# Altium PCB AIO-RF-v2.PcbDoc
Units mil, origin at the board's own origin, x right, y up, seen from the top; angles counter-clockwise.
Board outline 2160 x 3300 mil, 4 copper layers (Top Layer, Inner Layer 1, Inner Layer 2, Bottom Layer), stack 62.13 mil thick; 50 components, 44 nets, 218 pads, 251 vias.
Unrouted connection lines stored in the file: 4.
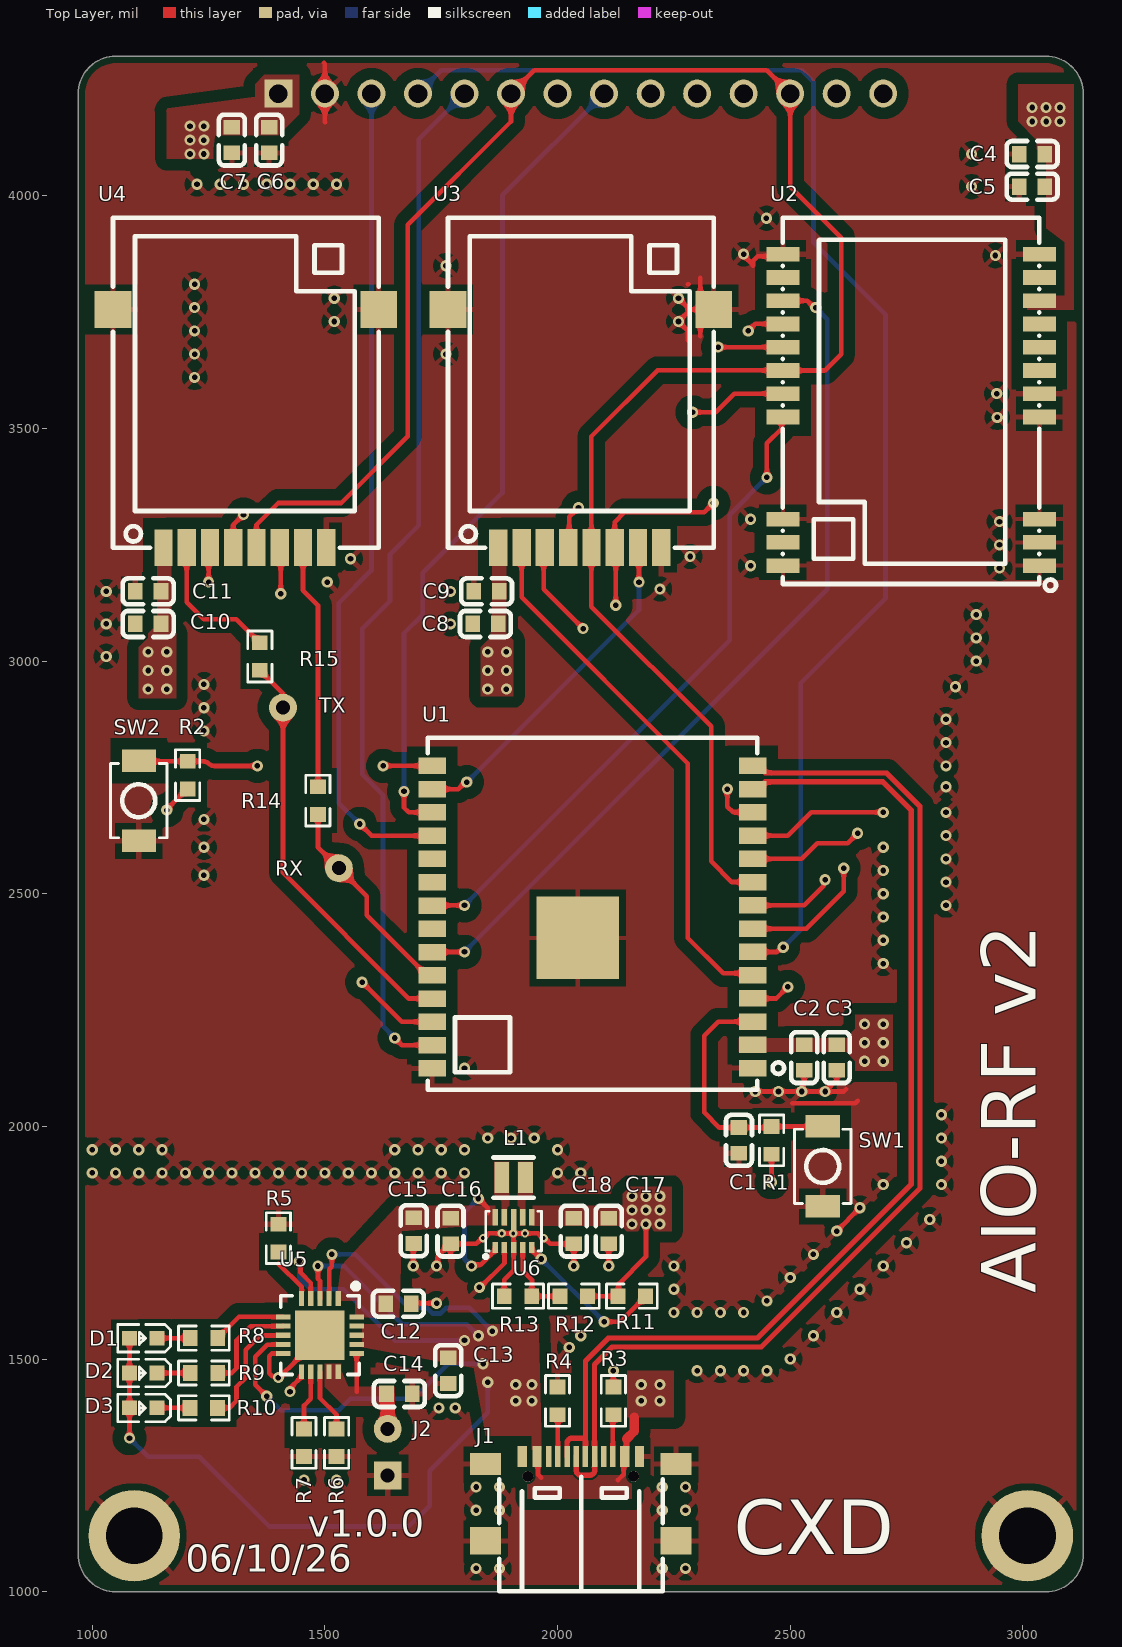
[diagram p0: Top Layer view]
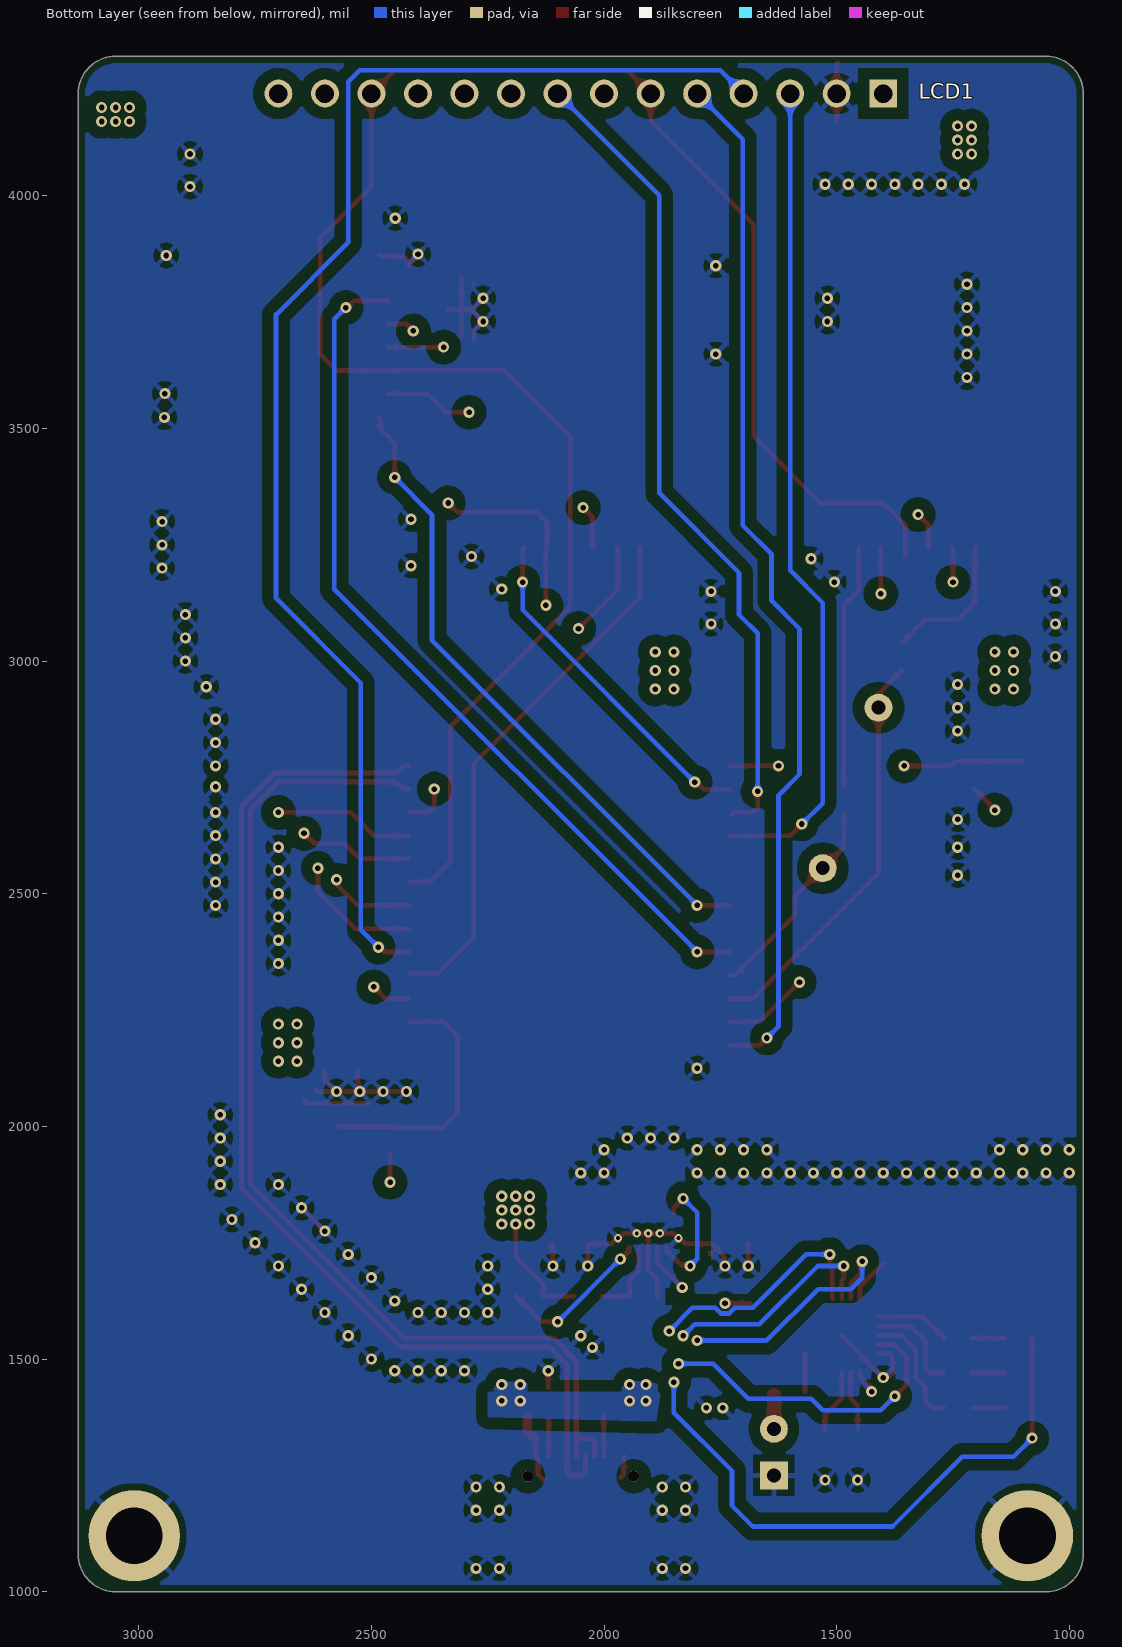
[diagram p1: Bottom Layer view, seen from below]
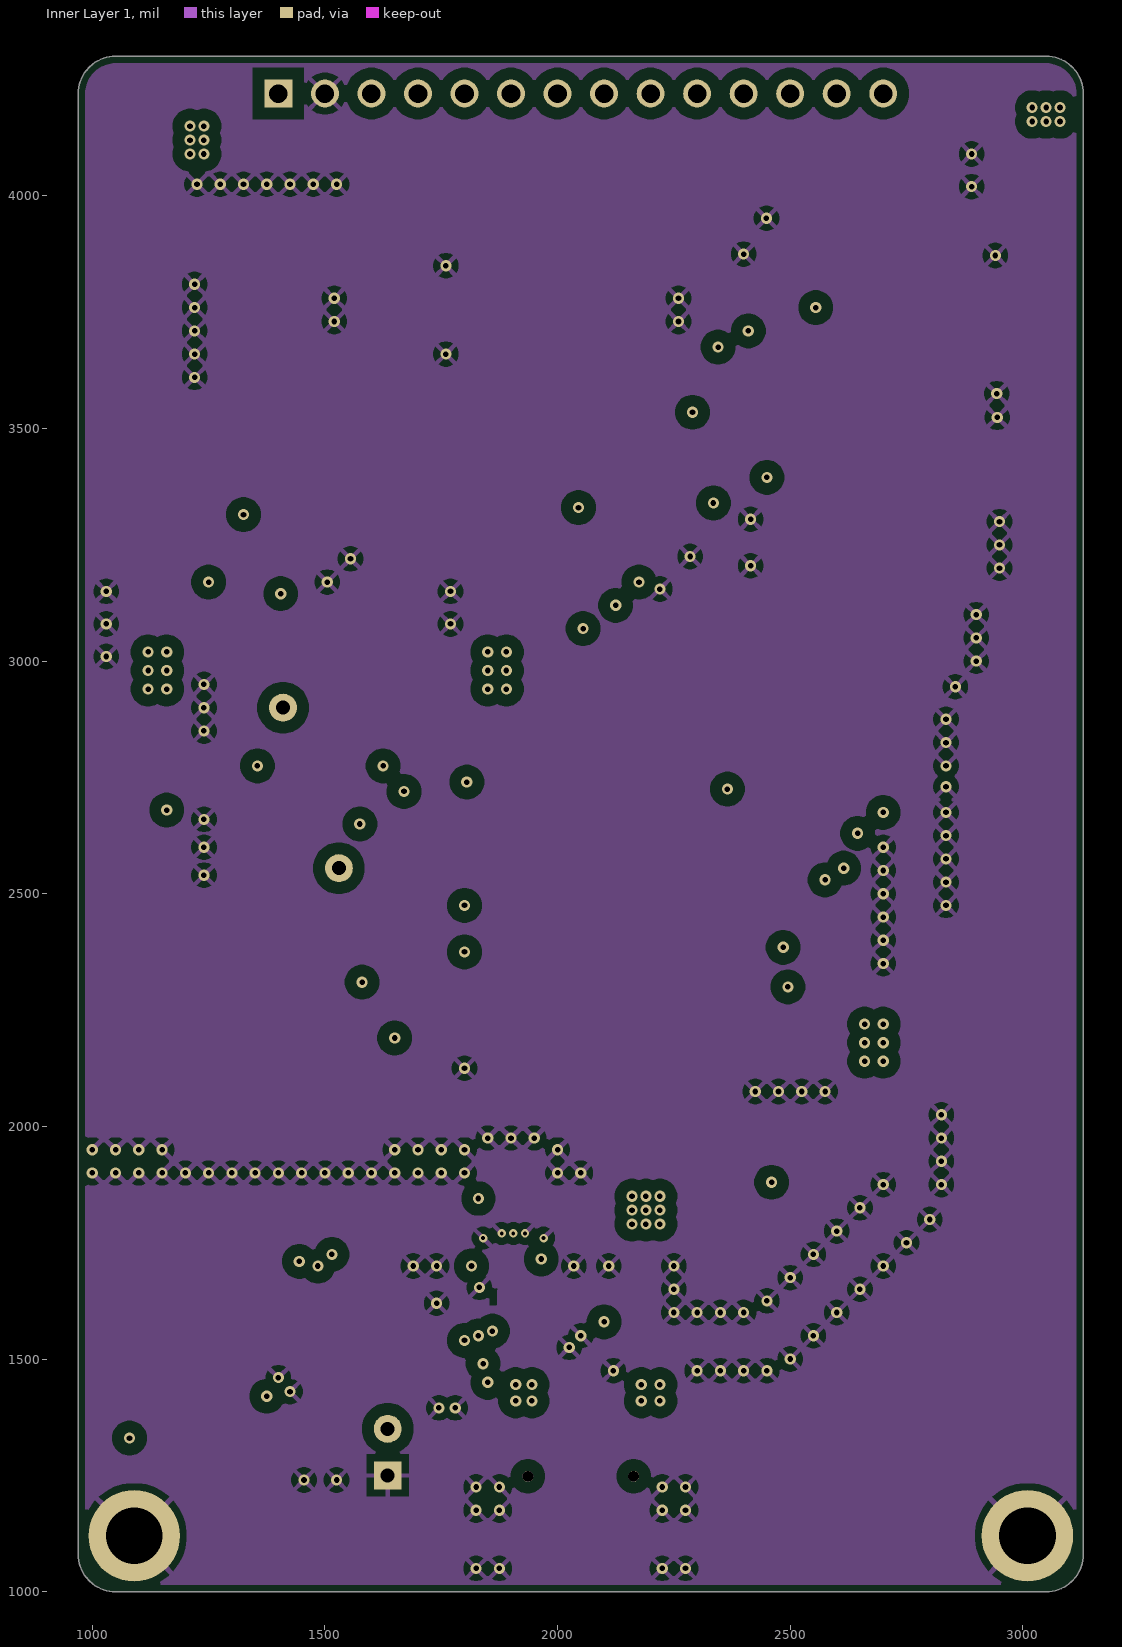
[diagram p2: Inner Layer 1]
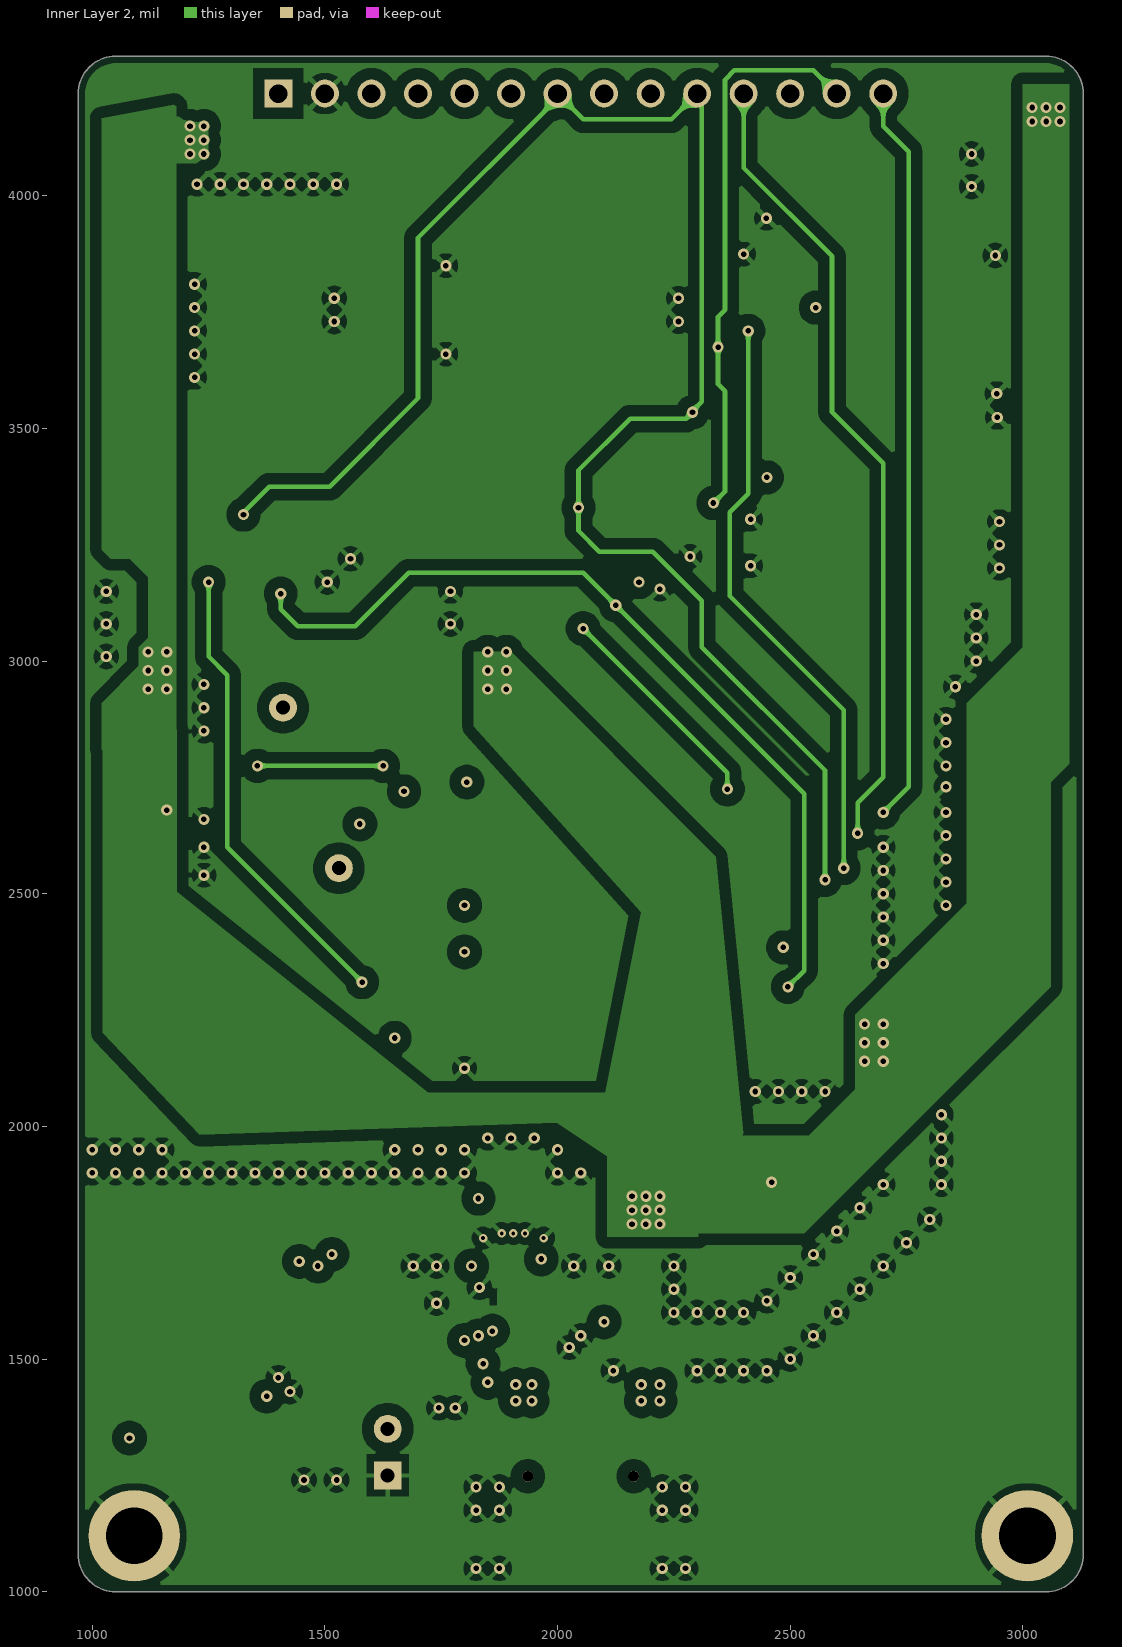
[diagram p3: Inner Layer 2]
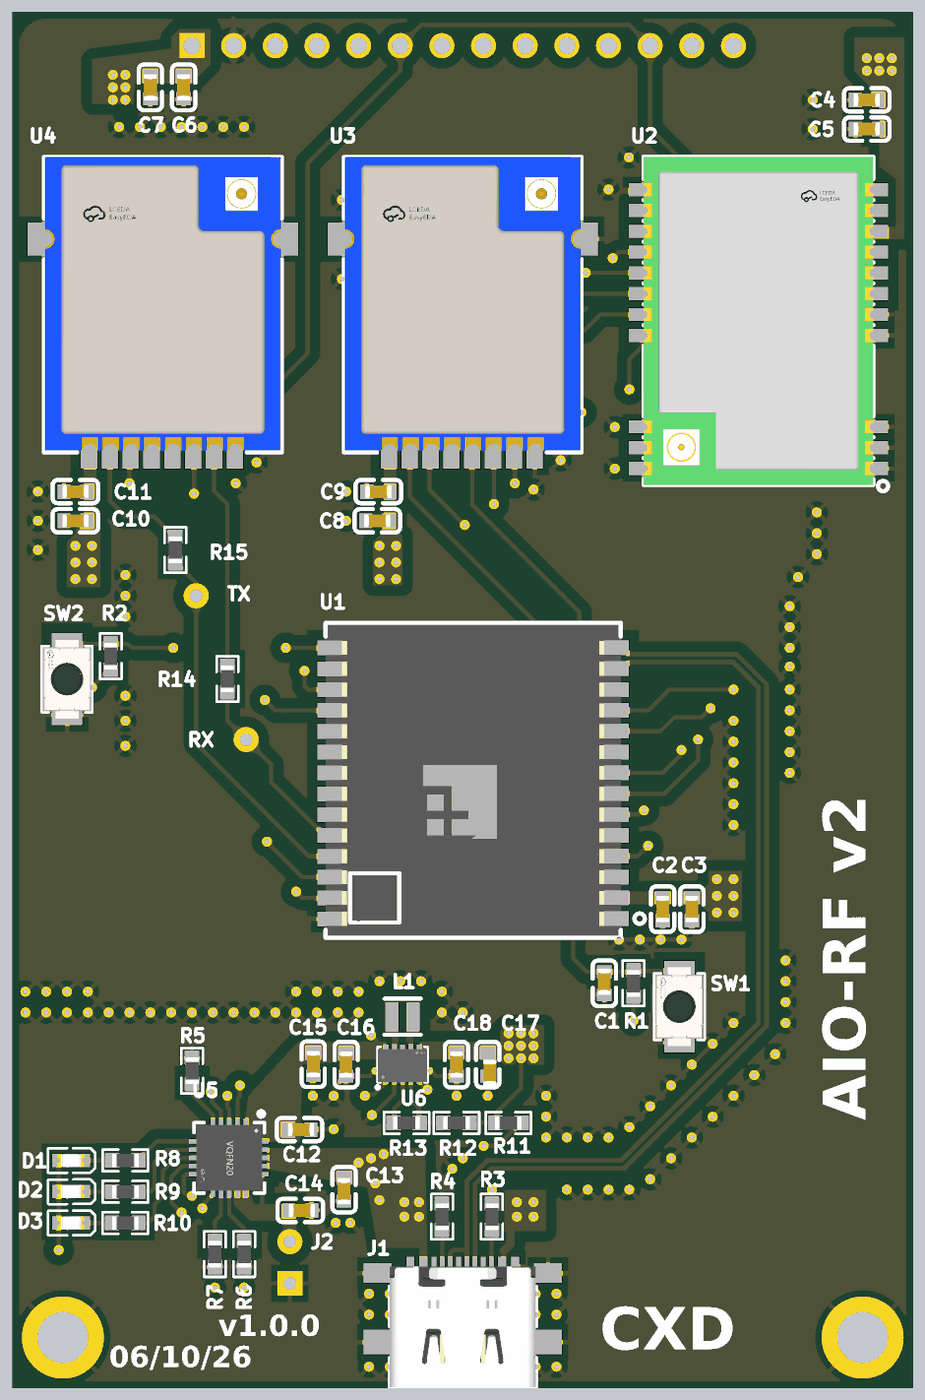
[diagram p4: 3D render of the assembled board from above, using the file's embedded part models]

## Layer stack, top to bottom
Top Solder: solder mask 0.4, Solder Resist, Dk 3.5
Top Layer: signal copper 1.38
Dielectric 4: prepreg 4.21, PP-006, Dk 4.1
Dielectric 2: prepreg 3.91, PP-006, Dk 4.1
Inner Layer 1: signal copper 0.6
Dielectric 1: dielectric 41.93, FR-4, Dk 4.8
Inner Layer 2: signal copper 0.6
Dielectric 3: prepreg 3.91, PP-006, Dk 4.1
Dielectric 5: prepreg 4.21, PP-006, Dk 4.1
Bottom Layer: signal copper 1.38
Bottom Solder: solder mask 0.4, Solder Resist, Dk 3.5

## Board outline
970,1080 970,4220 cw(c1050,4220) 1050,4300 3050,4300 cw(c3050,4220) 3130,4220 3130,1080 cw(c3050,1080) 3050,1000 1050,1000 cw(c1050,1080)

## Design rules (kind name [scope] priority, off if disabled: settings)
BoardOutlineClearance [All] p1: gap=15 ignorepadtopadclearanceinfootprint=FALSE
Clearance Clearance_2 [InNamedPolygon('GND_POUR_MAIN')] p1: gap=25 ignorepadtopadclearanceinfootprint=TRUE
Clearance Clearance_1 [IsPad And InComponent('J1') vs IsPad And InComponent('J1')] p2: gap=5 ignorepadtopadclearanceinfootprint=TRUE
Clearance [All] p3: gap=5 ignorepadtopadclearanceinfootprint=TRUE
DiffPairsRouting [All] p1: maxlimit=8 minlimit=5 mostfreqgap=8 toplayer_mingap=8 toplayer_minwidth=11.26 toplayer_maxwidth=11.26 toplayer_prefwidth=11.26 midlayer1_maxgap=5 midlayer1_prefgap=5 midlayer1_minwidth=5.28 midlayer1_maxwidth=5.28 midlayer1_prefwidth=5.28 midlayer2_maxgap=5 midlayer2_prefgap=5 midlayer2_minwidth=5.28 midlayer2_maxwidth=5.28 midlayer2_prefwidth=5.28 bottomlayer_mingap=8 bottomlayer_minwidth=11.26 bottomlayer_maxwidth=11.26 bottomlayer_prefwidth=11.26 impedanceprofiledriven=TRUE impedanceprofileid={49900CF8-A248-4DBF-941E-E8373B0624FA} impedanceprofilevalue=90.000000 maxuncoupledlength=500
PlaneConnect PlaneConnect_1 [InNet('GND')] p1: planeconnectstyle=Relief reliefexpansion=25 reliefentries=4 reliefconductorwidth=10 reliefairgap=15
PlaneConnect [All] p2: planeconnectstyle=Direct reliefexpansion=20 reliefentries=4 reliefconductorwidth=10 reliefairgap=10
PolygonConnect PolygonConnect_1 [InNet('GND') vs InNet('GND')] p1: connectstyle=Relief reliefconductorwidth=10 reliefentries=4 polygonreliefangle="90 Angle" conductorbypadedge=TRUE mindistance=15 enablemindistance=FALSE airgapwidth=15
PolygonConnect [All] p2: connectstyle=Direct reliefconductorwidth=10 reliefentries=4 polygonreliefangle="90 Angle" airgapwidth=10
RoutingVias [All] p1: holewidth=12 width=24 viastyle="Through Hole" minholewidth=12 minwidth=24 maxholewidth=28 maxwidth=50
SolderMaskExpansion [All] p1: expansion=0 istentingtop=FALSE
SupplyNets "Schematic Supply Nets_2" [InNet('+5')] p1: voltage=0.000
SupplyNets "Schematic Supply Nets_1" [InNet('GND')] p2: voltage=0.000
SupplyNets "Schematic Supply Nets" [InNet('+3.3')] p3: voltage=0.000
Width Width_1 [All] p1: maxlimit=10 minlimit=6 preferedwidth=6
Width [All] p2: maxlimit=10 minlimit=6 preferedwidth=8
28 further rules are at their usual default settings.

## Classes and differential pairs
component class Sheet2: C12 C13 C14 C15 C16 C17 C18 D1 D2 D3 J2 L1 R5 R6 R7 R8 R9 R10 R11 R12 R13 U5 U6
component class Sheet1: C1 C2 C3 C4 C5 C6 C7 C8 C9 C10 C11 J1 LCD1 R1 R2 R3 R4 R14 R15 RX SW1 SW2 TX U1 U2 U3 U4
differential pair USB: +USB_P -USB_N

## Components (designator, comment, footprint, x,y, rotation, side; value= is the part's Value field where it differs from the comment)
C1 "C19666 4.7uF" C19666 2390,1970 r270 top
C2 "C1591 100nF" C1591 2530,2148 r90 top
C3 "C19702 10uF" C19702 2600,2148 r90 top
C4 "C1591 100nF" C1591 3020,4090 r0 top
C5 "C19702 10uF" C19702 3020,4020 r0 top
C6 "C19702 10uF" C19702 1380,4120 r90 top
C7 "C1591 100nF" C1591 1300,4120 r90 top
C8 "C19702 10uF" C19702 1845,3080 r180 top
C9 "C1591 100nF" C1591 1847.44,3150 r180 top
C10 "C19702 10uF" C19702 1120,3080 r180 top
C11 "C1591 100nF" C1591 1120,3150 r180 top
C12 "C19666 4.7uF" C19666 1658,1619 r180 top
C13 "C19666 4.7uF" C19666 1765,1475 r90 top
C14 "C19666 4.7uF" C19666 1660,1425 r180 top
C15 "C19702 10uF" C19702 1691,1776 r90 top
C16 "C1591 100nF" C1591 1770,1775 r90 top
C17 "C86295 22uF" C86295 2110,1775 r90 top
C18 "C1591 100nF" C1591 2035,1775 r90 top
D1 "C219226" C219226 1109.49,1545.01 r180 top
D2 "C219226" C219226 1109.49,1470.01 r180 top
D3 "C219226" C219226 1109.49,1395.01 r180 top
J1 "C5187472 TYPE-C 16P QTWT" C5187472 2050,1200 r0 top
J2 "2P-2.54" 2P-2.54 1635,1250 r0 top
L1 "hctc-201610-1r0-m" Inductor 1872.28,1856.69 r0 top
LCD1 "LCD" LCD 1400,4220 r90 bottom
R1 "C98220 10kΩ" C98220 2460,1970 r90 top
R2 "C98220 10kΩ" C98220 1205,2755 r90 top
R3 "C105580 5.1KΩ" C105580 2120,1410 r270 top
R4 "C105580 5.1KΩ" C105580 2000,1410 r270 top
R5 "C98220 10KΩ" C98220 1400,1760 r270 top
R6 "C22975 2KΩ" C22975 1525,1320 r270 top
R7 "C98220 10KΩ" C98220 1455,1320 r90 top
R8 "C105580 5.1KΩ" C105580 1240,1545 r180 top
R9 "C105580 5.1KΩ" C105580 1240,1470 r180 top
R10 "C105580 5.1KΩ" C105580 1239.66,1395 r180 top
R11 "100K" C22975 2159.66,1635 r180 top
R12 "511K" C22975 2035,1635 r0 top
R13 "91K" C22975 1915,1635 r0 top
R14 "DNP" C98220 1485,2700.34 r90 top
R15 "DNP" C98220 1360,3010 r90 top
RX "TP" TP 1530,2555 r0 top
SW1 "C720477" C720477 2570,1913.98 r90 top
SW2 "C720477" C720477 1100,2700 r90 top
TX "TP" TP 1410,2900 r0 top
U1 "C52139915 ESPC5-32E-H4" C52139915 2075,2450 r180 top locked
U2 "C2965513 E07-400M10S" C2965513 2760,3540 r0 top
U3 "C97340 E01-ML01SP4" C97340 2050,3500 r0 top
U4 "C97340 E01-ML01SP4" C97340 1330,3500 r0 top
U5 "C5121473" C5121473 1489.37,1551.26 r180 top
U6 "C1849531" C1849531 1905.63,1772.48 r0 top

## Footprints (in the part's own frame and the unit in brackets; to place one, negate y for a bottom-side part, rotate by r counter-clockwise, add the part's x,y. Pads: shape width x height; smd on the part's side, far side on the other; paste and mask are expansions set on the pad)
2P-2.54 [mil]
  rect 60x60 hole 30: 1(0,0)
  round 60 hole 30: 2(0,100)
C1591 [mm]
  rect 0.8x0.9 smd paste+0 mask+0.051: 1(-0.7,0) 2(0.7,0)
  silkscreen extent -1.39,-0.71 1.39,0.71, body extent -0.8,-0.4 0.8,0.4, height 0.4
C19666 [mm]
  rect 0.8x0.9 smd paste+0 mask+0.051: 1(-0.7,0) 2(0.7,0)
  silkscreen extent -1.39,-0.71 1.39,0.71, body extent -0.9,-0.4 0.7,0.4, height 0.4
C19702 [mm]
  rect 0.8x0.9 smd paste+0 mask+0.051: 1(-0.7,0) 2(0.7,0)
  silkscreen extent -1.39,-0.71 1.39,0.71, body extent -0.8,-0.4 0.8,0.4, height 0.4
C22975 [mil]
  rect 31.75x34.02 smd paste-3937.01 mask+2: 1(-29.66,0) 2(29.66,0)
  silkscreen extent -55,-26 55,26, body extent -32,-16 32,16, height 17
C86295 [mm]
  rect 0.8x0.9 smd paste+0 mask+0.051: 1(-0.7,0) 2(0.7,0)
  silkscreen extent -1.39,-0.71 1.39,0.71, body extent -1.3,-0.53 0.3,0.27, height 0.4
C97340 [mm]
  rect 1x2 smd paste+0 mask+0.051: 1(-4.499,-6.501) 2(-3.23,-6.498) 3(-1.96,-6.498) 4(-0.69,-6.498) 5(0.58,-6.498) 6(1.85,-6.498) 7(3.12,-6.498) 8(4.39,-6.498)
  rect 2x2 smd paste+0 mask+0.051: 9(7.25,6.501) 10(-7.25,6.501)
  silkscreen extent -7.25,-6.5 7.25,11.5, body extent -7.2,-6.39 7.2,11.51, height 2.1
C98220 [mil]
  rect 31.75x34.02 smd paste-3937.01 mask+2: 1(-29.66,0) 2(29.66,0)
  silkscreen extent -55,-26 55,26, body extent -32,-16 32,16, height 17
C105580 [mil]
  rect 31.75x34.02 smd paste-3937.01 mask+2: 1(-29.66,0) 2(29.66,0)
  silkscreen extent -55,-26 55,26, body extent -32,-16 32,16, height 17
C219226 [mm]
  rect 0.8x0.8 smd paste+0 mask+0.051: 1(-0.749,0) 2(0.749,0)
  silkscreen extent -1.49,-0.75 1.39,0.76, body extent -0.81,-0.41 0.81,0.41, height 0.55
C720477 [mm]
  rect 1.23x1.86 smd paste+0 mask+0.051: 1(-2.185,0) 2(2.185,0)
  silkscreen extent -2.03,-1.54 2.03,1.54, body extent -2.4,-1.45 2.4,1.45, height 1.95
C1849531 [mm]
  rect 0.3x0.6 smd paste+0 mask+0.051: 1(-1,-0.825) 2(-0.5,-0.825) 3(0,-0.825) 4(0.5,-0.825) 5(1,-0.825)
  rect 0.3x0.9 smd paste+0 mask+0.051: 6(1,0.825) 7(0.5,0.825) 9(-0.5,0.825) 10(-1,0.825)
  rect 0.3x1.3 smd paste+0 mask+0.051: 8(0,0.625)
  silkscreen extent -1.62,-1.42 1.52,1.14, body extent -1.5,-1 1.5,1, height 0.58
C2965513 [mm]
  rect 1.8x0.8 smd paste+0 mask+0.05: 1(7,-8.5) 2(7,-7.23) 3(7,-5.96) 4(7,-0.39) 5(7,0.88) 6(7,2.15) 7(7,3.42) 8(7,4.69) 9(7,5.96) 10(7,7.23) 11(7,8.5) 12(-7,8.5) 13(-7,7.23) 14(-7,5.96) 15(-7,4.69) 16(-7,3.42) 17(-7,2.15) 18(-7,0.88) 19(-7,-0.39) 20(-7,-5.96) 21(-7,-7.23) 22(-7,-8.5)
  silkscreen extent -7,-9.88 7.91,10.5, body extent -7,-9.5 7,10.5, height 2.41
C5121473 [mm]
  rect 0.28x0.8 smd paste-100 mask+0.051: 1(-1,-2) 2(-0.5,-2) 3(0,-2) 4(0.5,-2) 5(1,-2) 11(1,2) 12(0.5,2) 13(0,2) 14(-0.5,2) 15(-1,2)
  rect 0.8x0.28 smd paste-100 mask+0.051: 6(2,-1) 7(2,-0.5) 8(2,0) 9(2,0.5) 10(2,1) 16(-2,1) 17(-2,0.5) 18(-2,0) 19(-2,-0.5) 20(-2,-1)
  rect 2.7x2.7 smd paste-100 mask+0.051: 21(0,0)
  silkscreen extent -2.15,-2.82 2.15,2.15, body extent -2.01,-2.01 2.01,2.01, height 1
C5187472 [mm]
  rect 1.7x1.5 smd paste+0 mask+0.051: 0(-5.2,-2.309) 0(5.2,-2.309)
  rect 1.7x1.2 smd paste+0 mask+0.051: 0(-5.2,1.891) 0(5.2,1.891)
  rect 0.5x1.14 smd paste+0 mask+0.051: A1B12(-3.2,2.308) A4B9(-2.4,2.308) B1A12(3.2,2.308) B4A9(2.4,2.308)
  rect 0.3x1.14 smd paste+0 mask+0.051: A5(-1.25,2.308) A6(-0.25,2.308) A7(0.25,2.308) A8(1.25,2.309) B5(1.75,2.308) B6(0.75,2.308) B7(-0.75,2.308) B8(-1.75,2.309)
  round 0.6 hole 0.6 unplated: ""(-2.89,1.221) ""(2.89,1.221)
  silkscreen extent -4.46,-5.05 4.48,1.2, body extent -5.67,-5.05 5.67,2.55, height 1.61
C52139915 [mm]
  rect 1.5x0.9 smd paste+0 mask+0.051: 1(-8.75,8.25) 2(-8.75,6.98) 3(-8.75,5.71) 4(-8.75,4.44) 5(-8.75,3.17) 6(-8.75,1.9) 7(-8.75,0.63) 8(-8.75,-0.64) 9(-8.75,-1.91) 10(-8.75,-3.18) 11(-8.75,-4.45) 12(-8.75,-5.72) 13(-8.75,-6.99) 14(-8.75,-8.26) 15(8.75,-8.25) 16(8.75,-6.98) 17(8.75,-5.71) 18(8.75,-4.44) 19(8.75,-3.17) 20(8.75,-1.9) 21(8.75,-0.63) 22(8.75,0.64) 23(8.75,1.91) 24(8.75,3.18) 25(8.75,4.45) 26(8.75,5.72) 27(8.75,6.99) 28(8.75,8.26)
  rect 4.5x4.5 smd paste+0 mask+0.051: 29(0.8,1.14)
  silkscreen extent -10.47,-9.78 9,9.42, body extent -9,-9.75 9,9.45, height 3
Inductor [mm]
  rect 0.8x1.7 smd paste+0 mask+0.051: 1(0.196,0.846) 2(1.496,0.846)
  silkscreen extent -0.25,-0.25 1.95,1.95
LCD [mil]
  rect 60x60 hole 40: 1(0,0)
  round 60 hole 40: 2(0,100) 3(0,200) 4(0,300) 5(0,400) 6(0,500) 7(0,600) 8(0,700) 9(0,800) 10(0,900) 11(0,1000) 12(0,1100) 13(0,1200) 14(0,1300)
TP [mil]
  round 60 hole 30: 1(0,0)

## Part data
C1 C12 C13 C14: library part C19666, "4.7uF (475) ±10% 16V", Manufacturer=SAMSUNG(三星), Manufacturer Part Number=CL10A475KO8NNNC, Package=C0603, Imported By="JLCAltiumImporter 0.3.1", LCSC Part Number=C19666, Supplier=LCSC, Supplier Part Number=C19666
C2 C4 C7 C9 C11 C16 C18: library part C1591, "100nF (104) ±10% 50V", Manufacturer=SAMSUNG(三星), Manufacturer Part Number=CL10B104KB8NNNC, Package=C0603, Imported By="JLCAltiumImporter 0.3.1", LCSC Part Number=C1591, Supplier=LCSC, Supplier Part Number=C1591
C3 C5 C6 C8 C10 C15: library part C19702, Manufacturer=SAMSUNG(三星), Manufacturer Part Number=CL10A106KP8NNNC, Package=C0603, Imported By="JLCAltiumImporter 0.3.1", LCSC Part Number=C19702, Supplier=LCSC, Supplier Part Number=C19702
C17: library part C86295, Manufacturer=SAMSUNG(三星), Manufacturer Part Number=CL10A226MP8NUNE, Package=C0603, Imported By="JLCAltiumImporter 0.3.1", LCSC Part Number=C86295, Supplier=LCSC, Supplier Part Number=C86295
D1 D2 D3: Manufacturer=HONGLITRONIC(鸿利光电), Manufacturer Part Number=HL-PST-1608H233W(9000-16000K), Package=LED0603-RD, Imported By="JLCAltiumImporter 0.3.2", LCSC Part Number=C219226, Supplier=LCSC, Supplier Part Number=C219226
J1: library part C5187472, Manufacturer="SHOU HAN(首韩)", Manufacturer Part Number="TYPE-C 16P QTWT", Package=USB-TYPE-C-SMD_TYPE-C-16P-QTWT, Imported By="JLCAltiumImporter 0.2.3", LCSC Part Number=C5187472, Supplier=LCSC, Supplier Part Number=C5187472
L1: JLCPCB Part Class="Extended Part", LCSC Part Name="1uH ±20% 4.6A", Manufacturer=YOUCHI(佑驰), ManufacturerPart=HCTC-201610-1R0-M, AddInBom=yes, ConvertToPcb=yes, Datasheet=https://item.szlcsc.com/datasheet/HCTC-201610-1R0-M/51586942.html, FootprintName=IND-SMD_L2.0-W1.6_MTQH201610S, ModelId=354c7c64a6c14853a17e163bf9c9633c, ModelName=IND-SMD_L2.0-W1.6_MTQH201610S, ModelTransform=78.74,63.3857,0,0,0,0,0,0,0, Supplier=LCSC, Supplier Footprint=0806, SupplierPart=C49190099, Symbol=HCTC-201610-1R0-M
R1 R2 R5 R7 R14 R15: library part C98220, Manufacturer=YAGEO(国巨), Manufacturer Part Number=RC0603FR-0710KL, Package=R0603, Imported By="JLCAltiumImporter 0.3.1", LCSC Part Number=C98220, Supplier=LCSC, Supplier Part Number=C98220
R3 R4 R8 R9 R10: library part C105580, Manufacturer=YAGEO(国巨), Manufacturer Part Number=RC0603FR-075K1L, Package=R0603, Imported By="JLCAltiumImporter 0.3.1", LCSC Part Number=C105580, Supplier=LCSC, Supplier Part Number=C105580
R6 R11 R12 R13: library part C22975, "2KΩ (2001) ±1%", Manufacturer=UNI-ROYAL(厚声), Manufacturer Part Number=0603WAF2001T5E, Package=R0603, Imported By="JLCAltiumImporter 0.3.1", LCSC Part Number=C22975, Supplier=LCSC, Supplier Part Number=C22975
SW1 SW2: Manufacturer=XUNPU(讯普), Manufacturer Part Number=TS-1088-AR02016, Package=SW-SMD_L3.9-W3.0-P4.45, Imported By="JLCAltiumImporter 0.2.3", LCSC Part Number=C720477, Supplier=LCSC, Supplier Part Number=C720477
U1: library part C52139915, Manufacturer=DOIT(四博智联), Manufacturer Part Number=ESPC5-32E-H4, Package=WIFIM-SMD_28P-L19.2-W18.0-P1.27-TL_ESPC5-32E-H4, Imported By="JLCAltiumImporter 0.2.3", LCSC Part Number=C52139915, Supplier=LCSC, Supplier Part Number=C52139915
U2: library part C2965513, Manufacturer=EBYTE(亿佰特), Manufacturer Part Number=E07-400M10S, Package=COMM-SMD_E07-400M10S, Imported By="JLCAltiumImporter 0.2.3", LCSC Part Number=C2965513, Supplier=LCSC, Supplier Part Number=C2965513
U3 U4: library part C97340, Manufacturer=EBYTE(亿佰特), Manufacturer Part Number=E01-ML01SP4, Package=WIRELM-TH_E01-ML01SP4, Imported By="JLCAltiumImporter 0.2.3", LCSC Part Number=C97340, Supplier=LCSC, Supplier Part Number=C97340
U5: Manufacturer=MICROCHIP(美国微芯), Manufacturer Part Number=MCP73871-2CCI/ML, Package=QFN-20_L4.0-W4.0-P0.50-BL-EP2.7, Imported By="JLCAltiumImporter 0.3.1", LCSC Part Number=C5121473, Supplier=LCSC, Supplier Part Number=C5121473
U6: Manufacturer=TI(德州仪器), Manufacturer Part Number=TPS63802DLAT, Package=VSON-10-HR_L3.0-W2.0-P0.50-BL_TI_DLA, Imported By="JLCAltiumImporter 0.3.5", LCSC Part Number=C1849531, Supplier=LCSC, Supplier Part Number=C1849531

## Free pads (board coordinates)
  round 196.85 hole 122.05 paste-99999 mask-99999: 18(1090,1120) 18(3010,1120)

## Via types
v1: diameter 24, hole 12, Top Layer to Bottom Layer, 246 vias
v2: diameter 18, hole 8, Top Layer to Bottom Layer, 5 vias

## Nets (pads, with @x,y where several pads share a name; then routed paths per layer and width w, separated by ;. In a path a pad name is that pad's centre, name@x,y a point inside that pad or via, vN(x,y) a via of type N, cw(c..) or ccw(c..) an arc to the next point about the centre after c; other vN are vias at no path point)
+3.3: C2.2 C3.2 C4.2 C5.2 C6.2 C7.2 C8.1 C9.1 C10.1 C11.1 C17.2 C18.2 LCD1.1 R1.1 R2.1 R11.2 R12.2 U1.2 U2.9 U3.1 U4.1 U6.6 | length 370.2
  Top Layer w10: v1(1160,2680) 1160,2681.47 1203.87,2725.34 R2.1 ; R12.2 R11.2 2131.15,1636.15 2131.15,1661.15 2190,1720 v1(2190,1790) ; v1(2460,1880) R1.1
  other v1: 2160,1790 2220,1790 2160,1820 2190,1820 2220,1820 2160,1850 2190,1850 2220,1850 2660,2140 2700,2140 2660,2180 2700,2180 2660,2220 2700,2220 1120,2940 1160,2940 1850,2940 1890,2940 1120,2980 1160,2980 1850,2980 1890,2980 1120,3020 1160,3020 1850,3020 1890,3020 1210,4090 1240,4090 1210,4120 1240,4120 1210,4150 1240,4150 3020,4160 3050,4160 3080,4160 3020,4190 3050,4190 3080,4190
+5: C13.2 D1.2 D2.2 D3.2 J1.A4B9 J1.B4A9 U5.2 U5.3 U5.4 U5.9 U5.17 U5.18 U5.19 | length 3695.1
  Top Layer w10: v1(1080,1330) D3.2 D2.2 D1.2 ; v1(1375,1420) 1350,1445 1350,1505 1376.06,1531.06 1410.12,1531.06 U5.9 ; v1(1445,1710) 1447.68,1707.32 1447.68,1685.39 1469.68,1663.38 U5.4 ; v1(1485,1700) 1485,1672.37 1489.37,1668 U5.3 ; U5.2 1509.53,1630.47 1509.53,1693 1515,1698.47 v1(1515,1725) ; J1.A4B9 1958.03,1288.37 1958.03,1251.97 1965,1245 ; 2130,1240 2141.97,1251.96 2141.97,1288.36 J1.B4A9 2148.32,1294.71 2148.32,1328.32
  Top Layer w20: 2148.32,1328.32 2165,1345 2165,1375
  Bottom Layer w10: v1(1080,1330) 1120,1290 1230,1290 1380,1140 1680,1140 1725,1185 1725,1260 1850,1385 v1(1850,1450) ; v1(1375,1420) 1405,1390 1530,1390 1555,1415 1690,1415 1765,1490 v1(1840,1490) ; v1(1445,1710) 1445,1675 1470,1650 1540,1650 1650,1540 v1(1800,1540) ; v1(1485,1700) 1541,1700 1666,1575 1805,1575 v1(1830,1550) ; v1(1515,1725) 1565,1725 1680,1610 1718.89,1610 1730.89,1598 1749.11,1598 1761.11,1610 1810,1610 v1(1860,1560)
  other v1: 1910,1410 1945,1410 2180,1410 2220,1410 1910,1445 1945,1445 2180,1445 2220,1445
CC1: J1.B5 R3.2 | length 79.9
  Top Layer w10: J1.B5 2118.9,1369.24 R3.2@2120,1370.34
CC2: J1.A5 R4.2 | length 89.8
  Top Layer w10: R4.2 2000.79,1379.55 J1.A5
E07_CSN: U1.21 U2.19 | length 1402.7
  Top Layer w10: U1.21 1730.7,2475 v1(1800,2475) ; v1(2450,3395) 2450,3468.34 2481.42,3499.75 2481.42,3521.65 U2.19
  Bottom Layer w10: v1(1800,2475) 2370,3045 2370,3315 v1(2450,3395)
E07_GDO0: U1.7 U2.15 | length 1612.5
  Top Layer w10: v1(2410,3710) 2425,3725 2464.05,3725 U2.15@2464.41,3724.64 ; U1.7 2419.69,2425 2535,2425 2615,2505 v1(2615,2555)
  Inner Layer 2 w10: v1(2410,3710) 2410,3360 2370,3320 2370,3140 2615,2895 v1(2615,2555)
E07_GDO2: U1.23 U2.14 | length 1884.7
  Top Layer w10: U1.23 1730.71,2375 v1(1800,2375) ; U2.14@2464.41,3774.64 2536.57,3774.64 2551.21,3760 v1(2555,3760)
  Bottom Layer w10: v1(1800,2375) 2580,3155 2580,3735 v1(2555,3760)
EN: C1.1 R1.2 SW1.2 U1.3 | length 551.4
  Top Layer w10: U1.3 2345.2,2225.2 2315,2195 2315,2030 2347.44,1997.56 C1.1 2457.9,1997.56 R1.2 2569.66,1999.66 SW1.2
ESP_BOOT: R2.2 SW2.2 U1.15 | length 746.7
  Top Layer w10: v1(1355,2775) 1354.8,2774.8 1262.56,2774.8 cw(c1262.56,2792.56) 1250,2780 ; v1(1625,2775) 1730.31,2775 U1.15 ; SW2.2 ccw(c1103.28,2789.3) SW2.2@1103.28,2784.66 ; SW2.2 ccw(c1103.28,2789.3) SW2.2@1103.28,2784.66 ; SW2.2 ccw(c1103.28,2789.3) SW2.2@1103.28,2784.66 ; SW2.2 ccw(c1103.28,2789.3) SW2.2@1103.28,2784.66 ; SW2.2 ccw(c1103.28,2789.3) SW2.2@1103.28,2784.66 ; SW2.2 ccw(c1103.28,2789.3) SW2.2@1103.28,2784.66 ; SW2.2 ccw(c1103.28,2789.3) SW2.2@1103.28,2784.66 ; SW2.2 ccw(c1103.28,2789.3) SW2.2@1103.28,2784.66 ; SW2.2@1103.28,2784.66 R2.2 1238.75,2784.66 ; 1238.75,2784.66 cw(c1238.75,2768.75) 1250,2780 ; 1238.75,2784.66 cw(c1238.75,2768.75) 1250,2780 ; 1238.75,2784.66 cw(c1238.75,2768.75) 1250,2780 ; 1238.75,2784.66 cw(c1238.75,2768.75) 1250,2780 ; 1238.75,2784.66 cw(c1238.75,2768.75) 1250,2780 ; 1238.75,2784.66 cw(c1238.75,2768.75) 1250,2780 ; 1238.75,2784.66 cw(c1238.75,2768.75) 1250,2780 ; 1238.75,2784.66 cw(c1238.75,2768.75) 1250,2780
  Inner Layer 2 w10: v1(1355,2775) v1(1625,2775)
GND: C1.2 C2.1 C3.1 C4.1 C5.1 C6.1 C7.1 C8.2 C9.2 C10.2 C11.2 C12.1 C13.1 C14.1 C15.1 C16.1 C17.1 C18.1 J1.0 J1.A1B12 J1.B1A12 J2.1 LCD1.2 pad.18 R3.1 R4.1 R5.1 R6.2 R7.1 R13.1 SW1.1 SW2.1 U1.1 U1.28 U1.29 U2.1 U2.2 U2.3 U2.4 U2.5 U2.11 U2.12 U2.20 U2.22 U3.8 U3.9 U3.10 U4.8 U4.9 U4.10 U5.10 U5.11 U5.21 U6.2 U6.3 U6.8 | length 2169.5
  Top Layer w10: v1@1400,1458.79 1441.22,1500.01 1441.22,1503.11 U5.21 ; v1(1400,1460) 1397.32,1462.68 1387.22,1462.68 1380,1469.9 1380,1506.03 1385.86,1511.89 U5.10 ; v1@1430,1430 1427.68,1432.32 1427.68,1439.96 1450,1462.28 U5.11 ; 1498,4286 1500,4284 1500,4159 1501,4158 ; C12.1 1686.56,1620 v1(1740,1620) ; v1(1690,1700) 1690,1747.44 C15.1 ; v1(1740,1700) 1742.68,1702.68 1742.68,1722.09 1768.03,1747.44 1825.28,1747.44 1837.84,1760 1842.16,1760 1852.16,1770 v2(1880,1770) v2(1905,1770) ; v1(1832,1654) 1834,1654 1885.95,1705.95 U6.2 ; R13.1 1885.34,1670.34 1905.63,1690.63 U6.3 1905.32,1740.32 1905.32,1769.68 v2(1905,1770) ; v1(2035,1700) C18.1 1984.72,1747.44 1972.16,1760 1967.84,1760 1957.84,1770 v2(1930,1770) v2(1905,1770) ; v1(2110,1700) C17.1 C17.1@2117.44,1740 ; R3.1 v1(2120,1475) ; v1(2260,3780) 2280,3760 2280,3750 v1(2260,3730) 2280,3710 2280,3690 ; 2279,3756 2335.37,3756 U3.9 ; 2280,3810 2281.37,3810 ; 2307,3698 2307,3824 ; v1@2400,3870 2401.72,3870 2420,3851.72 ; 2420,3850 2420,3860 2430,3870 2479.77,3870 U2.12 ; v1(2425,2075) v1(2475,2075) v1(2575,2075) ; 2505,2050 2640,2050 2645,2055 ; v1(2525,2075) 2527.68,2077.68 2527.68,2092.68 2530,2095 C2.1@2530,2120 ; v1(2600,1775) v1(2650,1825) ; C3.1 2600,2095 2595,2095 v1(2575,2075) ; 2620,2080 2615,2075 v1(2575,2075)
  other v1: 1825,1050 1875,1050 2225,1050 2275,1050 1825,1175 1875,1175 2225,1175 2275,1175 1825,1225 1875,1225 2225,1225 2275,1225 1455,1240 1525,1240 1745,1395 1780,1395 1425,1430 2300,1475 2350,1475 2400,1475 2450,1475 2500,1500 2025,1525 2050,1550 2550,1550 2250,1600 2300,1600 2350,1600 2400,1600 2600,1600 2450,1625 2250,1650 2650,1650 2500,1675 2250,1700 2700,1700 2550,1725 2750,1750 2800,1800 2700,1875 2825,1875 1000,1900 1050,1900 1100,1900 1150,1900 1200,1900 1250,1900 1300,1900 1350,1900 1400,1900 1450,1900 1500,1900 1550,1900 1600,1900 1650,1900 1700,1900 1750,1900 1800,1900 2000,1900 2050,1900 2825,1925 1000,1950 1050,1950 1100,1950 1150,1950 1650,1950 1700,1950 1750,1950 1800,1950 2000,1950 1850,1975 1900,1975 1950,1975 2825,1975 2825,2025 1800,2125 2700,2350 2700,2400 2700,2450 2835,2475 2700,2500 2835,2525 1240,2540 2700,2550 2835,2575 1240,2600 2700,2600 2835,2625 1240,2660 2835,2675 2835,2730 2835,2775 2835,2825 1240,2850 2835,2875 1240,2900 2855,2945 1240,2950 2900,3000 1030,3010 2900,3050 1030,3080 1770,3080 2900,3100 1030,3150 1770,3150 2220,3155 1505,3170 2950,3200 2415,3205 1555,3220 2285,3225 2950,3250 2950,3300 2415,3305 2945,3524 2944,3575 1220,3610 1220,3660 1760,3660 1220,3710 1520,3730 1220,3760 1520,3780 1220,3810 1760,3850 2941,3872 2400,3875 2449,3952 2890,4020 1225,4025 1275,4025 1325,4025 1375,4025 1425,4025 1475,4025 1525,4025 2890,4090
  other v2: 1840,1760 1970,1760
MCP_OUT: C12.2 C15.2 C16.2 U5.1 U5.20 U6.1 U6.10 | length 274.2
  Top Layer w10: v1(1815,1700) 1817.68,1702.68 1834.84,1702.68 1865.35,1733.19 1865.35,1739.09 U6.1 ; v1(1830,1845) 1850,1825 1850,1814
  Bottom Layer w10: v1(1815,1700) 1800,1715 1800,1815 v1(1830,1845)
NetC14_2: C14.2 J2.2 U5.14 U5.15 U5.16 | length 158
  Top Layer w10: 1568.11,1430 U5.16 ; C14.2 C14.2@1635,1422.44
  Top Layer w30: J2.2 C14.2@1635,1422.44
NetD1_1: D1.1 R8.2 | length 71.4
  Top Layer w10: D1.1 R8.2
NetD2_1: D2.1 R9.2 | length 71.4
  Top Layer w10: D2.1 R9.2
NetD3_1: D3.1 R10.2 | length 71
  Top Layer w10: D3.1 R10.2
NetL1_1: L1.1 U6.9
NetL1_2: L1.2 U6.7
NetR5_2: R5.2 U5.5 | length 95.7
  Top Layer w10: 1400,1705 1450,1655 U5.5
NetR6_1: R6.1 U5.13 | length 137.6
  Top Layer w10: U5.13 1489.37,1415.63 1525,1380 R6.1
NetR7_2: R7.2 U5.12 | length 128.9
  Top Layer w10: R7.2 1455,1400 1469.68,1414.68 U5.12
NetR11_1: R11.1 U6.5 | length 337.5
  Top Layer w10: U6.5 1945,1734.09 1964.09,1715 v1(1965,1715) ; v1(2100,1580) 2134.35,1580 2177.34,1622.99 2178.44,1622.99 2189.32,1633.87 R11.1
  Bottom Layer w10: v1(1965,1715) v1(2100,1580)
NetR12_1: R12.1 R13.2 U6.4 | length 174
  Top Layer w10: U6.4 1925.32,1689.68 1945,1670 1945,1635.34 R13.2 R12.1
NetR14_1: R14.1 RX.1 U1.24 | length 454.5
  Top Layer w10: R14.1 1485,2600 RX.1 1590,2495 1590,2453.51 1718.7,2324.81 U1.24
NetR15_1: R15.1 TX.1 U1.25 | length 888.5
  Top Layer w10: R15.1 1410,2930.34 TX.1 1410,2545 1680.19,2274.81 U1.25
NRF2_CE: R15.2 U4.2 | length 310.6
  Top Layer w10: U4.2 1202.82,3126.84 1239.66,3090 1309.66,3090 R15.2
NRF2_CSN: U1.26 U4.3 | length 1257.8
  Top Layer w10: v1(1250,3170) 1250,3241.35 U4.3 ; v1(1580,2310) 1665.19,2224.81 U1.26
  Inner Layer 2 w10: v1(1250,3170) 1250,3010 1290,2970 1290,2600 v1(1580,2310)
NRF2_IRQ: R14.2 U4.7 | length 527.5
  Top Layer w10: U4.7 1452.82,3152.18 1485,3120 R14.2
NRF_CE: U1.5 U3.2 | length 1159.7
  Top Layer w10: U3.2 1922.82,3137.18 2280,2780 2280,2405 2355.82,2329.18 2415.51,2329.18 U1.5
NRF_CSN: U1.12 U3.3 | length 781
  Top Layer w10: U3.3 1970,3241.35 1970,3155 v1(2055,3070) ; v1(2365,2725) 2365,2687.52 2377.32,2675.2 U1.12
  Inner Layer 2 w10: v1(2055,3070) 2365,2760 v1(2365,2725)
NRF_IRQ: U1.16 U3.7 | length 739.2
  Top Layer w10: U1.16@1730.31,2725 1786.21,2725 1801.21,2740 v1(1805,2740) ; U3.7 2175,3241.99 v1(2175,3170)
  Bottom Layer w10: v1(1805,2740) 2175,3110 v1(2175,3170)
PG: R8.1 U5.6 | length 160.5
  Top Layer w10: R8.1 1269.66,1546.13 1280.54,1557.01 1281.67,1557.01 1315.29,1590.63 U5.6
SPI2_MISO: LCD1.13 U1.4 U2.16 U3.6 U4.6 | length 3763.9
  Top Layer w10: U4.6 1405.02,3241.97 v1(1405,3145) ; v1(2125,3120) 2125,3241.99 U3.6 2122.82,3299.03 2143.79,3320 2315,3320 v1(2335,3340) ; v1(2345,3675) 2464.05,3675 U2.16@2464.41,3674.64 ; U1.4 2419.69,2275 2470,2275 v1(2495,2300)
  Inner Layer 2 w10: v1(1405,3145) 1405,3111.47 1441.47,3075 1565,3075 1680,3190 2055,3190 v1(2125,3120) 2530,2715 2530,2335 v1(2495,2300) ; v1@2335.23,3340 2360,3364.77 2360,3580 2345,3595 v1(2345,3675) 2345,3740 2360,3755 2360,4250 2380,4270 2550,4270 LCD1.13
SPI2_MOSI: LCD1.6 LCD1.12 U1.9 U2.17 U3.5 U4.5 | length 4283.2
  Top Layer w10: U4.5@1352.68,3227.84 1352.68,3292.68 1400,3340 1535,3340 1678,3483 1678,3938 1900,4160 LCD1.6 1950,4270 2450,4270 LCD1.12 2500,4020 2610,3910 2610,3660 2574.64,3624.64 2464.41,3624.64 2464.05,3625 2215,3625 2072.82,3482.82 U3.5 2072.82,3117.18 2330,2860 2330,2570 2374.8,2525.2 U1.9
SPI2_SCK: LCD1.7 LCD1.10 U1.8 U2.18 U3.4 U4.4 | length 4317.8
  Top Layer w10: U4.4 1302.82,3292.82 v1(1325,3315) ; U3.4 2025,3246.35 2025,3310 v1(2045,3330) ; v1(2290,3535) 2340,3535 2380,3575 2464.05,3575 U2.18@2464.41,3574.64 ; U1.8 2419.69,2475 2530,2475 2572.32,2517.32 2572.32,2527.32 v1(2575,2530)
  Inner Layer 2 w10: v1(1325,3315) 1325,3318.79 1331.59,3325.38 1331.59,3326.59 1380,3375 1510,3375 1700,3565 1700,3910 2000,4210 LCD1.7 2055,4165 2245,4165 LCD1.10 2309.57,4210.43 2309.57,4189.58 2310,4189.14 2310,3557.86 2290,3537.86 v1(2290,3535) 2276.25,3521.25 2156.25,3521.25 2045,3410 v1(2045,3330) 2045,3280 2090,3235 2205,3235 2310,3130 2310,3030 2575,2765 v1(2575,2530)
STAT1: R10.1 U5.8 | length 258.8
  Top Layer w10: R10.1 1295,1395 1310,1410 1310,1440 1330,1460 1330,1520 1360.75,1550.75 1410.12,1550.75 U5.8
STAT2: R9.1 U5.7 | length 217.9
  Top Layer w10: R9.1 1300,1470 1310,1480 1310,1540 1340.43,1570.43 1410.12,1570.43 U5.7
TFT_CS: LCD1.3 U1.18 | length 1784.8
  Top Layer w10: v1(1575,2650) 1600.2,2624.8 U1.18
  Bottom Layer w10: v1(1575,2650) 1530,2695 1530,3125 1600,3195 LCD1.3@1600,4221.24
TFT_DC: LCD1.5 U1.27 | length 2236.9
  Top Layer w10: v1(1650,2190) 1665.19,2174.81 U1.27
  Bottom Layer w10: v1(1650,2190) 1625,2215 1625,2712.14 1580,2757.14 1580,3070 1640,3130 1640,3230 1701.56,3291.56 1701.56,4121.56 LCD1.5
TFT_LED: LCD1.8 U1.17 | length 1774.3
  Top Layer w10: v1(1670,2720) 1670,2685 1680,2675 1720,2675 U1.17@1725,2670
  Bottom Layer w10: v1(1670,2720) 1670,3060 1710,3100 1710,3190 1881.56,3361.56 1881.56,4001.56 LCD1.8
TFT_RST: LCD1.4 U1.6 | length 2966.1
  Top Layer w10: U1.6 2419.69,2375 2471.21,2375 2481.21,2385 v1(2485,2385)
  Bottom Layer w10: LCD1.4 1750,4270 2525,4270 2550,4245 2550,3900 2705,3745 2705,3135 2523,2953 2523,2423 v1(2485,2385)
TOUCH_CS: LCD1.11 U1.10 | length 1985.4
  Top Layer w10: U1.10 2419.69,2575 2525,2575 2558.33,2608.33 2623.33,2608.33 v1(2645,2630)
  Inner Layer 2 w10: LCD1.11 2400,4060 2590,3870 2590,3535 2700,3425 2700,2750.72 2645,2695.72 v1(2645,2630)
TOUCH_IRQ: LCD1.14 U1.11 | length 1891.9
  Top Layer w10: U1.11 2419.69,2625 2495,2625 2545,2675 v1(2700,2675)
  Inner Layer 2 w10: v1(2700,2675) 2755,2730 2755,4095 2700,4150 LCD1.14
USB_N: J1.A7 J1.B7 U1.13 | length 2312
  Top Layer w11.26: 2020.1,1318.64 2020.19,1307.68 J1.B7 ; 2020.1,1318.69 cw(c2031.36,1318.74) 2031.36,1330 2060,1330 2060,1307.68 J1.A7 ; 2060.05,1330 2060.05,1495.86 2109.19,1545 2430,1545 2760,1875 2760,2680 2699.43,2740.57 2446.67,2740.57 2438.99,2732.88 cw(c2420.43,2751.43) 2420.43,2725.2 U1.13
USB_P: J1.A6 J1.B6 U1.14 | length 2382.9
  Top Layer w11.26: J1.A6 2040,1274.06 2040,1261.26 ccw(c2051.26,1261.26) 2051.26,1250 2068.61,1250 ccw(c2068.61,1261.26) 2079.87,1261.32 2079.8,1274.06 J1.B6 2079.31,1291.09 2079.31,1487.89 2117.16,1525.74 2437.98,1525.74 2779.26,1867.02 2779.26,2687.98 2707.41,2759.83 2446.67,2759.83 2431.3,2775.2 U1.14
pads on no net: J1. J1.A8 J1.B8 LCD1.9 U1.19 U1.20 U1.22 U2.6 U2.7 U2.8 U2.10 U2.13 U2.21

## Polygon pours and split planes (outlines as drawn)
GND on Top Layer "GND_POUR_MAIN" (solid, remove dead copper, pour order 37): 970,4300 3130,4300 3130,1000 970,1000
+3.3 on Top Layer "+3.3_L01_P026" (solid, pour order 26): 2133.29,1790.81 2149.1,1775 2245,1775 2245,1870 2155,1870 2140,1855 2140,1785
+3.3 on Top Layer "+3.3_L01_P031" (solid, pour order 31): 3110,4100 3110,4240 2990,4240 2990,4160 3030,4120 3030,4100
+3.3 on Top Layer "+3.3_L01_P032" (solid, pour order 32): 1260,4100 1260,4080 1160,4080 1160,4182.35 1270,4190
+3.3 on Top Layer "+3.3_L01_P033" (solid, pour order 33): 1180,4130 1400,4130 1445,4175 1445,4260 1370,4260 1350,4240 1350,4213.16 1156.9,4187.75
MCP_OUT on Top Layer "MCP_OUT_L01_P019" (solid, pour order 19): 1525,1625 1565,1625 1565,1590 1660,1590 1665,1775 1805,1785 1805,1823 1655,1830 1535,1700
NetL1_2 on Top Layer "NETL1_2_L01_P018" (solid, pour order 18): 1919,1787 1931,1787 1931,1840.37 1947,1854.37 1947,1924 1915,1924 1915,1830 1919,1826
NetL1_1 on Top Layer "NETL1_1_L01_P017" (solid, pour order 17): 1880,1787 1880,1839.19 1864,1854.19 1864,1924 1896,1924 1896,1830 1892,1826 1892,1787
+3.3 on Top Layer "+3.3_L01_P016" (solid, pour order 16): 1947,1830 1947,1787 2140,1787 2140,1830
MCP_OUT on Top Layer "MCP_OUT_L01_P012" (solid, pour order 12): 1866.26,1830 1866.26,1788 1665,1788 1665,1830
+5 on Top Layer "+5_L01_P007" (solid, pour order 7): 1965,1305 1964.83,1305.17 1964.83,1349.04 1940.96,1349.04 1945,1345 1945,1305
+5 on Top Layer "+5_L01_P003" (solid, pour order 3): 1960,1575 1580,1575 1580,1525 1960,1454.25
+3.3 on Top Layer "+3.3_L01_P036" (solid, pour order 36): 1860,3090 1855,3050 1835,3030 1835,2925 1905,2925 1905,3045 1890,3060 1890,3065
+3.3 on Top Layer "+3.3_L01_P034" (solid, pour order 34): 1100,2920 1180,2920 1180,3060 1170,3070 1130,3070 1120,3060 1120,3050 1100,3030
+3.3 on Top Layer "+3.3_L01_P030" (solid, pour order 30): 2620,2190 2640,2210 2640,2240 2720,2240 2720,2120 2640,2120 2640,2140 2620,2160 2620,2185
+3.3 on Top Layer "+3.3_L01_P024" (solid, pour order 24): 3110,4110 3050,4110 3050,3930 3090,3900 3090,3785 3010,3785 3010,3755 3110,3755
+5 on Top Layer "+5_L01_P005" (solid, pour order 5): 1935,1250 1970,1250 2130,1250 2160,1250 2160,1200 1935,1200
+3.3 on Top Layer "+3.3_L01_P023" (solid, pour order 23): 2390,2190 2620,2190 2620,2160 2390,2160
+3.3 on Top Layer "+3.3_L01_P022" (solid, pour order 22): 1890,3060 1860,3060 1860,3260 1890,3260 1860,3260 1890,3260
+3.3 on Top Layer "+3.3_L01_P021" (solid, pour order 21): 1140,3060 1170,3060 1170,3260 1140,3260
NetC14_2 on Top Layer "NETC14_2_L01_P011" (solid, pour order 11): 1500,1490 1500,1440 1540,1400 1650,1400 1650,1440 1550,1440 1535,1475 1535,1490
+5 on Top Layer "+5_L01_P000" (solid, pour order 0): 2150,1474.8 2250,1474.8 2250,1375 2150,1375
+5 on Top Layer "+5_L01_P001" (solid, remove dead copper, pour order 1): 1805,1570 1960,1555 1965.16,1335 1845.39,1335
GND on Bottom Layer "GND_POUR_MAIN" (solid, pour order 44): 970,4300 3130,4300 3130,1000 970,1000
+5 on Bottom Layer "+5_L04_P047" (solid, pour order 47): 2165,1455 2165,1460 2165,1430 2250,1430 2250,1475 2165,1475
+5 on Bottom Layer "+5_L04_P046" (solid, pour order 46): 1885,1455 1885,1460 1885,1430 1970,1430 1970,1475 1885,1475
+5 on Bottom Layer "+5_L04_P006" (solid, pour order 6): 1878.64,1430 2250,1430 2250,1375 1887.51,1364.93
GND on Inner Layer 2 "GND_POUR_MAIN" (solid, pour order 43): 970,4300 3130,4300 3130,1000 970,1000
+3.3 on Inner Layer 2 "+3.3_L03_P025" (solid, pour order 25): 2640,2240 2640,2080 2540,1980 2140,1980 2140,1770 2530,1770 2800,2040 2800,2240
+3.3 on Inner Layer 2 "+3.3_L03_P029" (solid, pour order 29): 2640,2240 2880,2480 2880,2910 3000,3030 3000,4240 3100,4240 3100,2780 3060,2740 3060,2300 2800,2040 2760,2080 2640,2080
+3.3 on Inner Layer 2 "+3.3_L03_P039" (solid, pour order 39): 1180,2990 1180,4196.88 1020,4166.88 1020,3240 1040,3220 1080,3220 1120,3180 1120,3050 1100,3030 1100,2990
+3.3 on Inner Layer 2 "+3.3_L03_P045" (solid, pour order 45): 1260,4170 1260,4070 1180,4070 1170,4080 1170,4170
+3.3 on Inner Layer 2 "+3.3_L03_P041" (solid, pour order 41): 1020,2810 1180,2810 1180,2990 1100,2990 1020,2910
+3.3 on Inner Layer 2 "+3.3_L03_P028" (solid, pour order 28): 2106.94,1762.65 2106.94,1935.99 1998.58,2008.23 1231.42,1981.77 1021.94,2201.22 1021.94,2852.65 1181.94,2852.65 1181.94,2504.65 1721.94,2072.65 2161.94,2072.65 2301.94,1972.65 2301.94,1762.65
+3.3 on Inner Layer 2 "+3.3_L03_P027" (solid, pour order 27): 2340,2580 1900,3020 1820,3020 1820,2860 2180,2460 2084.35,1980 2400,1980
GND on Inner Layer 1 "GND_POUR_MAIN" (solid, pour order 42): 970,4300 3130,4300 3130,1000 970,1000

## Other copper
Multi-Layer:
  pour cut-out: 1869,1652 1869,1617 1868,1616 1854,1616 1854,1651 1870,1651

## Silkscreen, mask and mechanical layers (free items; w line width, h text height)
Top Overlay:
  text "AIO-RF v2" at 3066.5,1641.47 h200 r90
  text "v1.0.0" at 1463.12,1098.97 h100
  text "CXD" at 2378.61,1041.36 h200
  text "06/10/26" at 1200.71,1023.98 h100
Top Solder:
  circle w98.43: c1090,1120 r49.21
  circle w98.43: c3010,1120 r49.21
Bottom Solder:
  circle w98.43: c1090,1120 r49.21
  circle w98.43: c3010,1120 r49.21
Mechanical 1:
  the board outline again, w10